# EAGLE board watering_non_smd (EAGLE 8.2.2)
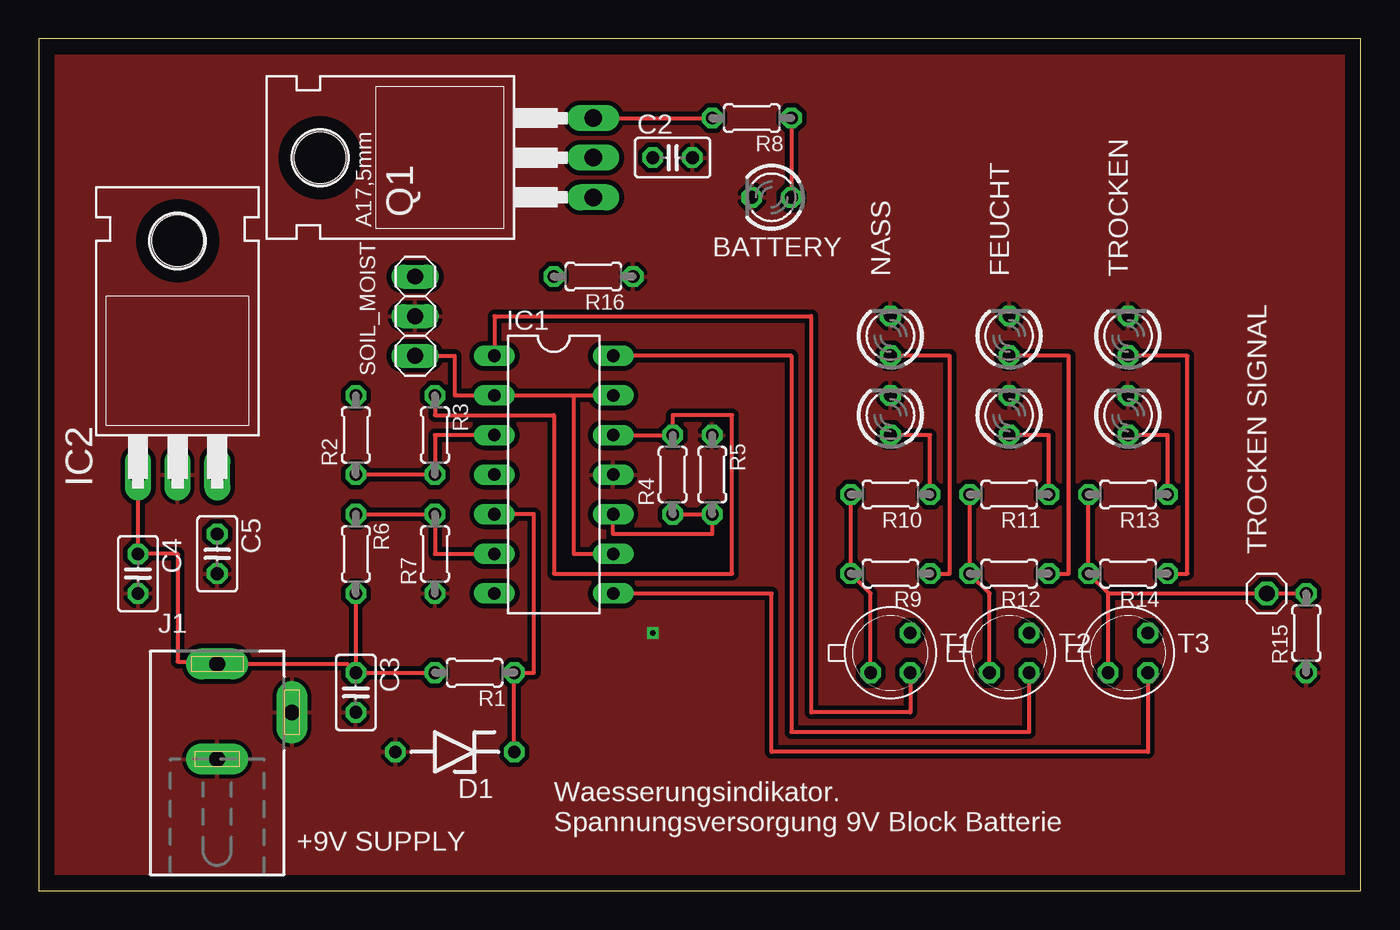
[diagram p0: board, top side]
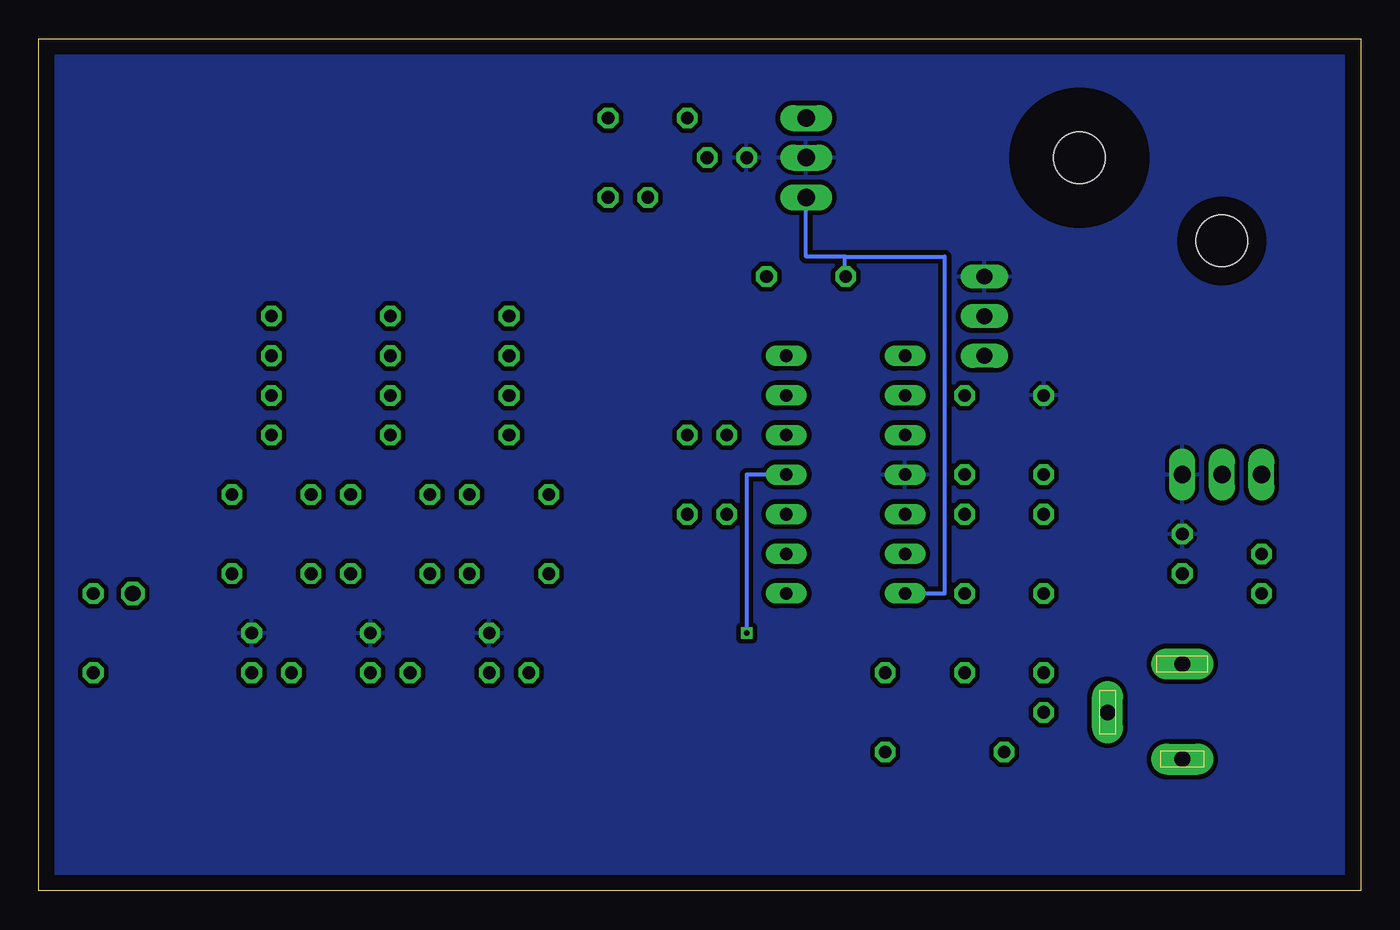
[diagram p1: board, bottom side, seen from below]

Size 84.76 x 54.6 mm. Coordinates in mm from the lower left corner, seen from the top.
Outline: 0,0 84.76,0 84.76,54.6 0,54.6 0,0
Copper layers (1*16): Top 0.035mm / dielectric 1.5mm / Bottom 0.035mm
Design rules "default *": minimum track width 6mil, minimum drill 0.35mm, track to track 6mil, track to pad 6mil, pad to pad 6mil, via to via 6mil, smd to smd 6mil, copper to edge 40mil, drill to drill 6mil, minimum pad ring 10mil, minimum via ring 8mil, stop-mask expansion 4mil, vias tented up to drill 0mil, thermal gap 10mil

## Footprints (pad centres in the part's own frame; a part is rotated, then mirrored left to right if it is on the bottom)
LED3MM = drill 0.813 octagon: A -1.27,0; K 1.27,0
C025-025X050 = drill 0.813 octagon: 1 -1.27,0; 2 1.27,0
ZDIO-7.5 = drill 0.813 octagon: A 3.81,0; C -3.81,0
DIL14 = drill 0.813 long: 1 -7.62,-3.81; 2 -5.08,-3.81; 3 -2.54,-3.81; 4 0,-3.81; 5 2.54,-3.81; 6 5.08,-3.81; 7 7.62,-3.81; 8 7.62,3.81; 9 5.08,3.81; 10 2.54,3.81; 11 0,3.81; 12 -2.54,3.81; 13 -5.08,3.81; 14 -7.62,3.81
TO220H = drill 1.118 long: 1 -2.54,-10.16; 2 0,-10.16; 3 2.54,-10.16 | hole 3.302: 0,4.826
DCJ0202 = drill 1 pad 2 long: 1 0,3.1; 2 4.8,0; 3 0,-3
1X01 = drill 1.016 octagon: 1 0,0
TO220BH = drill 1.118 long: D 0,-6.35; G -2.54,-6.35; S 2.54,-6.35 | hole 3.302: 0,11.176
0204/5 = drill 0.813 octagon: 1 -2.54,0; 2 2.54,0
1X03 = drill 1.016 long: 1 -2.54,0; 2 0,0; 3 2.54,0
TO18 = drill 0.813 octagon: 1 -1.27,-1.27; 2 1.27,-1.27; 3 1.27,1.27

## Placement (x,y rotation side)
BATTERY  [LED3MM]  46.99,44.45 180 top
C2  0.1uF  [C025-025X050]  40.64,46.99 0 top
C3  0.1uF  [C025-025X050]  20.32,12.7 270 top
C4  0.22uF  [C025-025X050]  6.35,20.32 270 top
C5  0.1uF  [C025-025X050]  11.43,21.59 270 top
D1  6.8  [ZDIO-7.5]  26.67,8.89 180 top
FEUCHT  [LED3MM]  62.23,35.56 90 top
IC1  LM324N  [DIL14]  33.02,26.67 270 top
IC2  7805T  [TO220H]  8.89,36.83 0 top
J1  DCJ0202  [DCJ0202]  11.43,11.43 0 top
JP1  JP2_DSIG  [1X01]  78.74,19.05 90 top
LED1  [LED3MM]  54.61,30.48 90 top
LED4  [LED3MM]  62.23,30.48 90 top
LED6  [LED3MM]  69.85,30.48 90 top
NASS  [LED3MM]  54.61,35.56 90 top
Q1  IRLZ44Z  [TO220BH]  29.21,46.99 90 top
R1  100  [0204/5]  27.94,13.97 180 top
R2  10k  [0204/5]  20.32,29.21 90 top
R3  1.8k  [0204/5]  25.4,29.21 270 top
R4  680  [0204/5]  40.64,26.67 90 top
R5  4.3k  [0204/5]  43.18,26.67 270 top
R6  1k  [0204/5]  20.32,21.59 270 top
R7  10k  [0204/5]  25.4,21.59 90 top
R8  220  [0204/5]  45.72,49.53 180 top
R9  150  [0204/5]  54.61,20.32 180 top
R10  150  [0204/5]  54.61,25.4 180 top
R11  150  [0204/5]  62.23,25.4 180 top
R12  150  [0204/5]  62.23,20.32 180 top
R13  150  [0204/5]  69.85,25.4 180 top
R14  150  [0204/5]  69.85,20.32 180 top
R15  4.7k  [0204/5]  81.28,16.51 90 top
R16  10k  [0204/5]  35.56,39.37 180 top
SOIL_MOIST  [1X03]  24.13,36.83 270 top
T1  2N2222  [TO18]  54.61,15.24 0 top
T2  2N2222  [TO18]  62.23,15.24 0 top
T3  2N2222A  [TO18]  69.85,15.24 0 top
TROCKEN  [LED3MM]  69.85,35.56 90 top

## Library data of the parts
BATTERY FEUCHT LED1 LED4 LED6 NASS TROCKEN = led
C2-C5 = rcl
D1 = diode
IC1 IC2 = linear
J1 = con-jack; OC_FARNELL: unknown; OC_NEWARK: unknown
JP1 SOIL_MOIST = pinhead
Q1 = transistor-power
R1-R16 = resistor
T1 T2 = transistor
T3 = transistor-npn

## Nets
+5V: C2.1 C5.1 IC1.4 IC2.3 Q1.D R2.2 SOIL_MOIST.1 T1.3 T2.3 T3.3
+9V: C3.1 C4.1 IC2.1 J1.1 R1.2 R6.2
GND: BATTERY.K C2.2 C3.2 C4.2 C5.2 D1.A FEUCHT.K IC1.11 IC2.2 J1.2 J1.3 LED1.K LED4.K LED6.K NASS.K R5.1 R7.1 R15.1 R16.1 SOIL_MOIST.2 TROCKEN.K
N$1: IC1.3 R2.1 R3.2
N$2: IC1.1 T1.2
N$3: D1.C IC1.5 R1.1
N$4: IC1.14 T2.2
N$5: IC1.8 T3.2
N$6: IC1.6 R6.1 R7.2
N$7: IC1.7 Q1.G R16.2
N$8: Q1.S R8.2
N$9: BATTERY.A R8.1
N$10: LED1.A R10.1
N$11: IC1.12 R3.1 R4.2
N$12: IC1.10 R4.1 R5.2
N$13: NASS.A R9.1
N$14: R9.2 R10.2 T1.1
N$15: R11.2 R12.2 T2.1
N$18: JP1.1 R13.2 R14.2 R15.2 T3.1
N$21: FEUCHT.A R12.1
N$22: LED4.A R11.1
N$23: R14.1 TROCKEN.A
N$24: LED6.A R13.1
SOIL_IN: IC1.2 IC1.9 IC1.13 SOIL_MOIST.3

## Tracks (layer width: path | path; a pad name or v marks a point on that pad's centre or on a via)
+5V
  pour Bottom (isolate 0.305): 0,64.77 85.09,64.77 85.09,0 0,0
+9V
  Top 0.254: C3.1 19.76,14.53 J1.1 11.28,14.68 8.89,14.68 8.89,21.59 C4.1 IC2.1 | C3.1 R1.2 | R6.2 C3.1
GND  (via drill 0.35)
  Bottom 0.254: IC1.11 39.37,26.67 v39.37,16.51
  pour Top (isolate 0.305): 0,64.77 85.09,64.77 85.09,0 0,0
N$1
  Top 0.254: R2.1 R3.2 25.4,29.21 IC1.3
N$2
  Top 0.254: T1.2 55.88,11.43 49.53,11.43 49.53,36.83 29.21,36.83 IC1.1
N$3
  Top 0.254: D1.C R1.1 31.75,13.97 31.75,24.13 IC1.5
N$4
  Top 0.254: T2.2 63.5,10.16 48.26,10.16 48.26,34.29 IC1.14
N$5
  Top 0.254: T3.2 71.12,8.89 46.99,8.89 46.99,19.05 IC1.8
N$6
  Top 0.254: R6.1 R7.2 25.4,21.59 IC1.6
N$7
  Bottom 0.254: IC1.7 26.67,19.05 26.67,40.64 33.06,40.64 | 33.06,40.64 35.56,40.64 Q1.G | R16.2 33.06,39.37 33.06,40.64
N$8
  Top 0.254: Q1.S R8.2
N$9
  Top 0.254: R8.1 BATTERY.A
N$10
  Top 0.254: R10.1 57.15,29.21 LED1.A
N$11
  Top 0.254: IC1.12 R4.2 40.64,30.48 44.45,30.48 44.45,20.32 33.02,20.32 33.02,30.48 25.4,30.48 R3.1
N$12
  Top 0.254: R4.1 R5.2 43.18,22.86 36.83,22.86 IC1.10
N$13
  Top 0.254: R9.1 58.42,20.32 58.42,34.29 NASS.A
N$14
  Top 0.254: T1.1 53.34,19.05 R9.2 R10.2
N$15
  Top 0.254: T2.1 60.96,19.05 R12.2 R11.2
N$18
  Top 0.254: T3.1 68.58,19.05 | 68.58,19.05 R14.2 R13.2 | R15.2 JP1.1 68.58,19.05
N$21
  Top 0.254: R12.1 66.04,20.32 66.04,34.29 FEUCHT.A
N$22
  Top 0.254: R11.1 64.77,29.21 LED4.A
N$23
  Top 0.254: R14.1 73.66,20.32 73.66,34.29 TROCKEN.A
N$24
  Top 0.254: R13.1 72.39,29.21 LED6.A
SOIL_IN
  Top 0.254: SOIL_MOIST.3 26.67,34.29 26.67,31.75 IC1.2 | IC1.2 30.48,31.75 | IC1.2 34.29,31.75 | 34.29,31.75 IC1.13 | 34.29,31.75 34.29,21.59 IC1.9

## Text on the board
tPlace: BATTERY | NASS | FEUCHT | TROCKEN | SOIL_MOIST | TROCKEN SIGNAL | Waesserungsindikator. / Spannungsversorgung 9V Block Batterie | +9V SUPPLY
_tNames: C2 | R8 | Q1 | R16 | IC1 | R3 | R5 | R2 | IC2 | R4 | C5 | R6 | R10 | R11 | R13 | C4 | R7 | R9 | R12 | R14 | J1 | C3 | T1 | T2 | T3 | R15 | R1 | D1